# Altium PCB tiny200r3.PcbDoc
Units mil, origin at the board's own origin, x right, y up, seen from the top; angles counter-clockwise.
Board outline 2000 x 900 mil, 4 copper layers (Top Layer, GND, MidLayer1, Bottom Layer), stack 28.8 mil thick; 137 components, 116 nets, 551 pads, 241 vias.
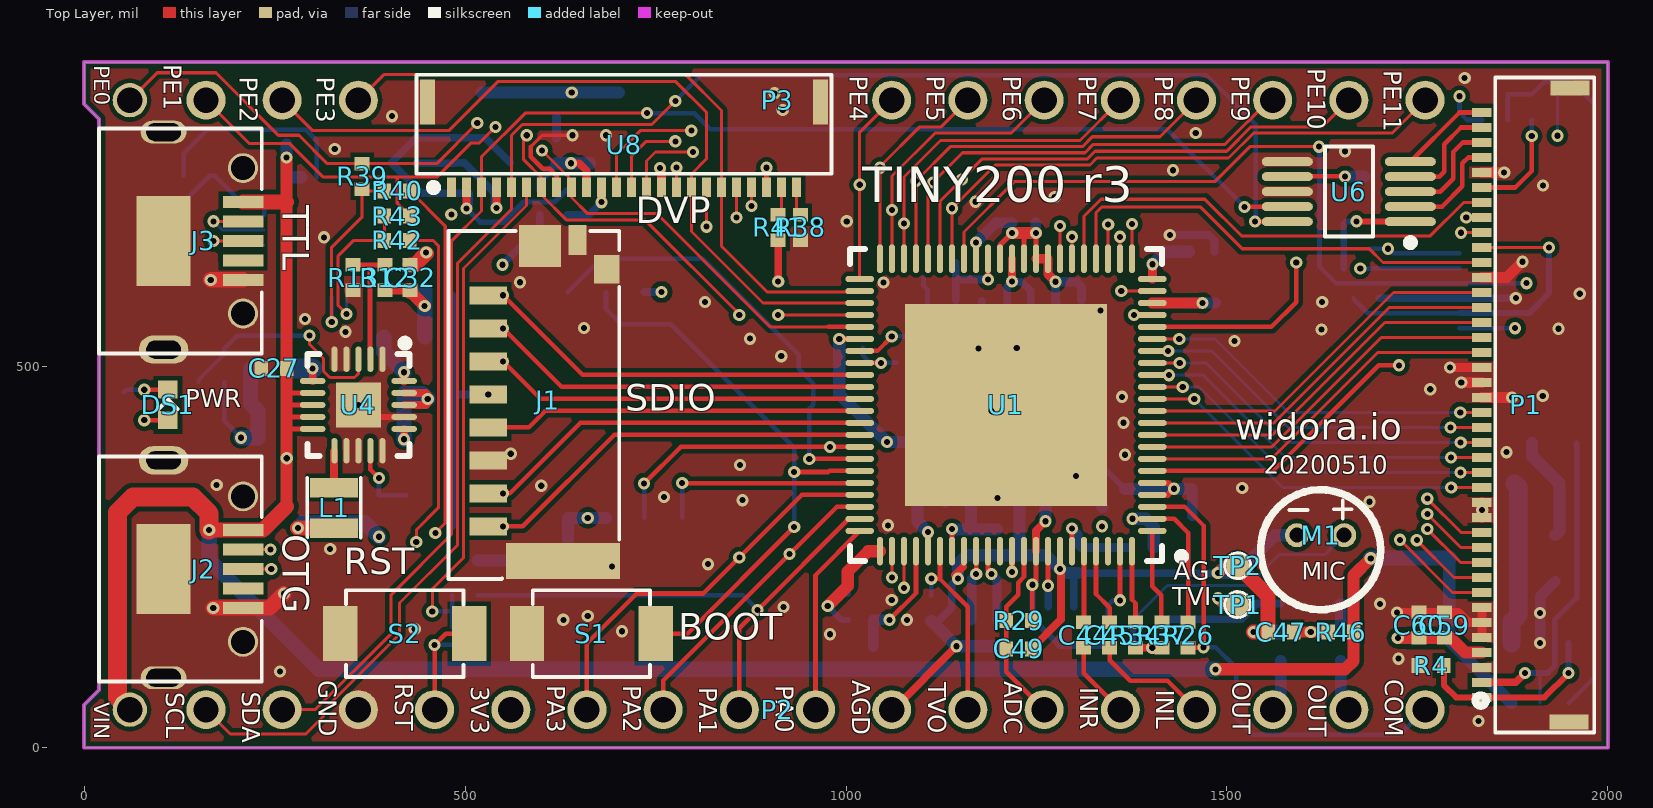
[diagram p0: Top Layer view]
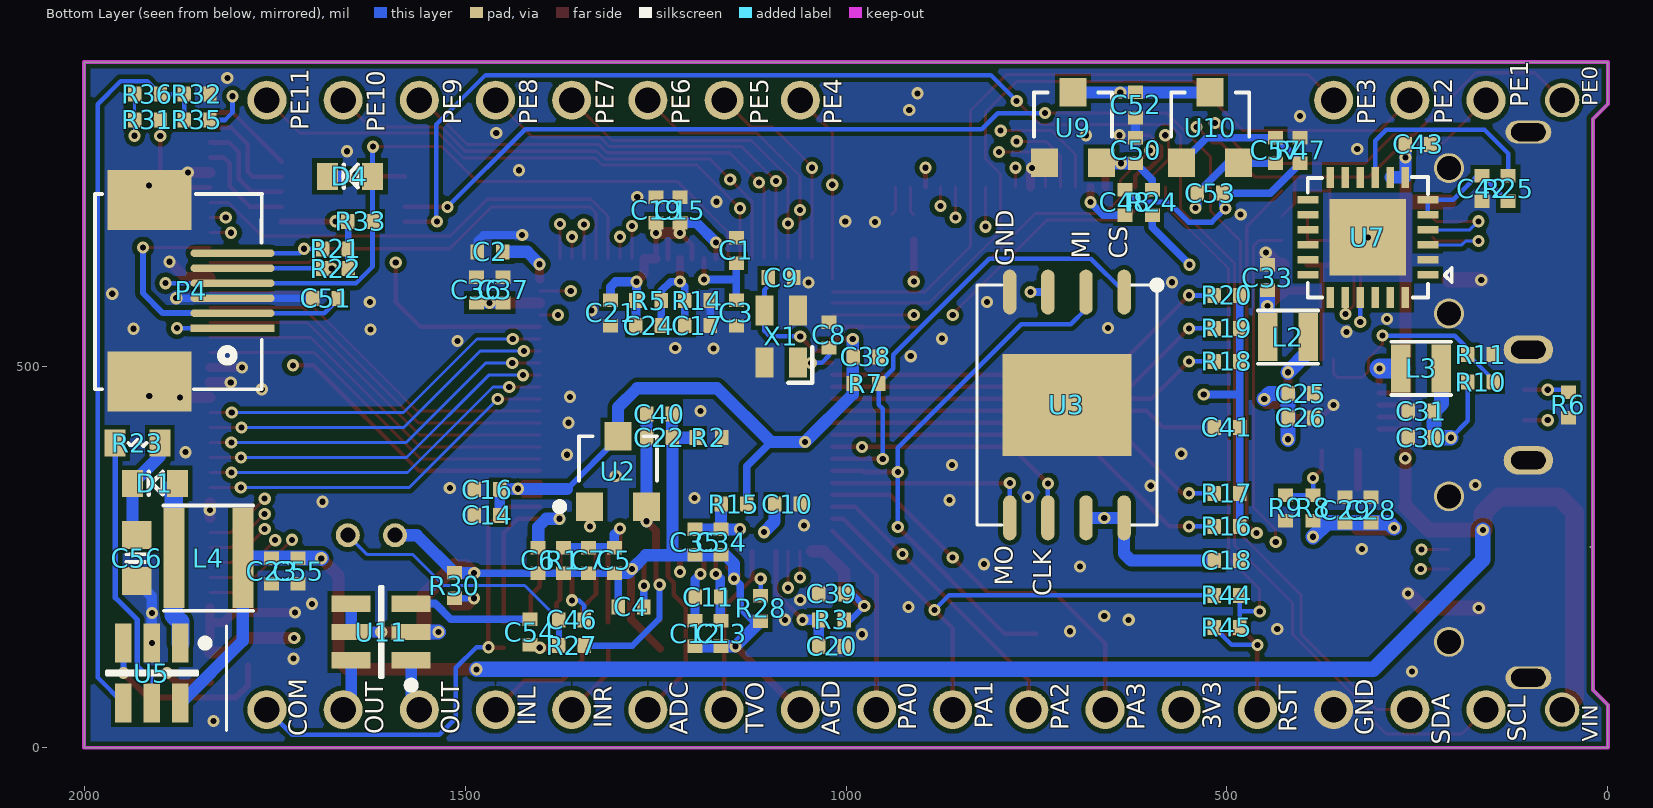
[diagram p1: Bottom Layer view, seen from below]
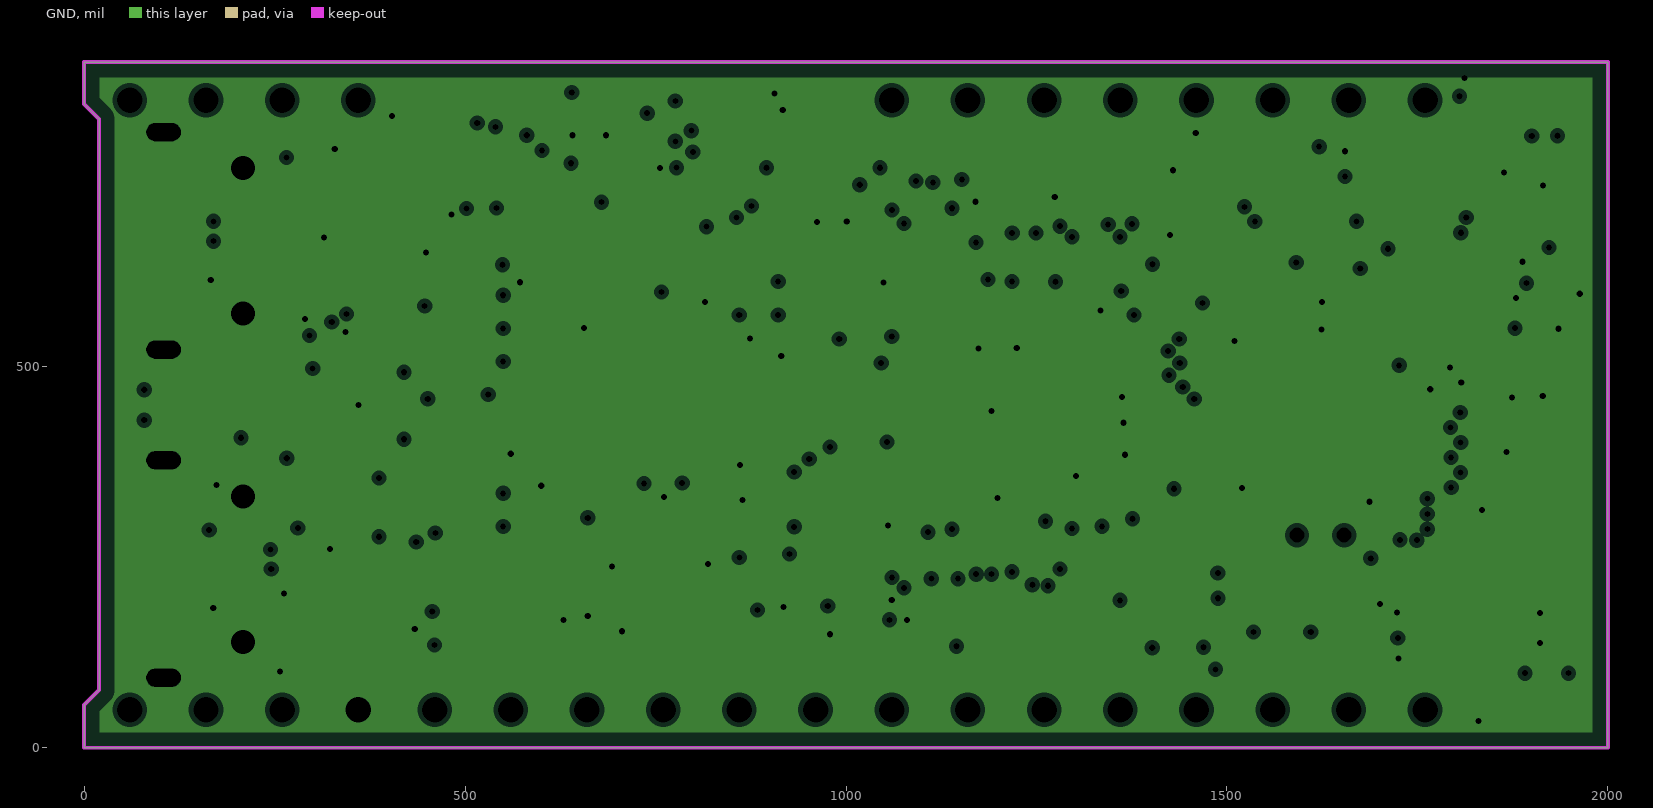
[diagram p2: GND, clearances drawn from the general rule]
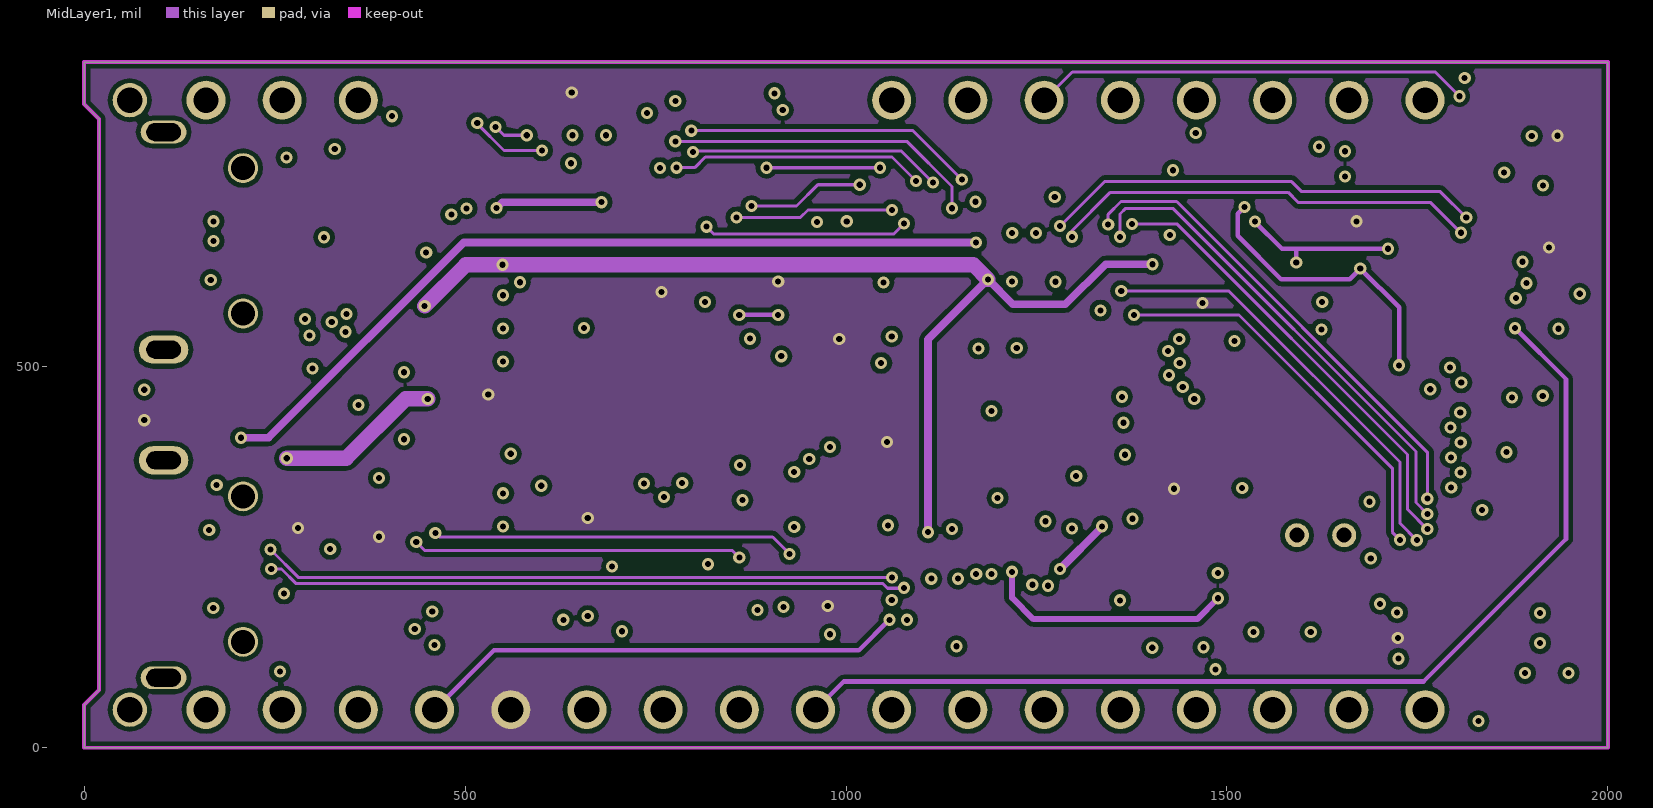
[diagram p3: MidLayer1]
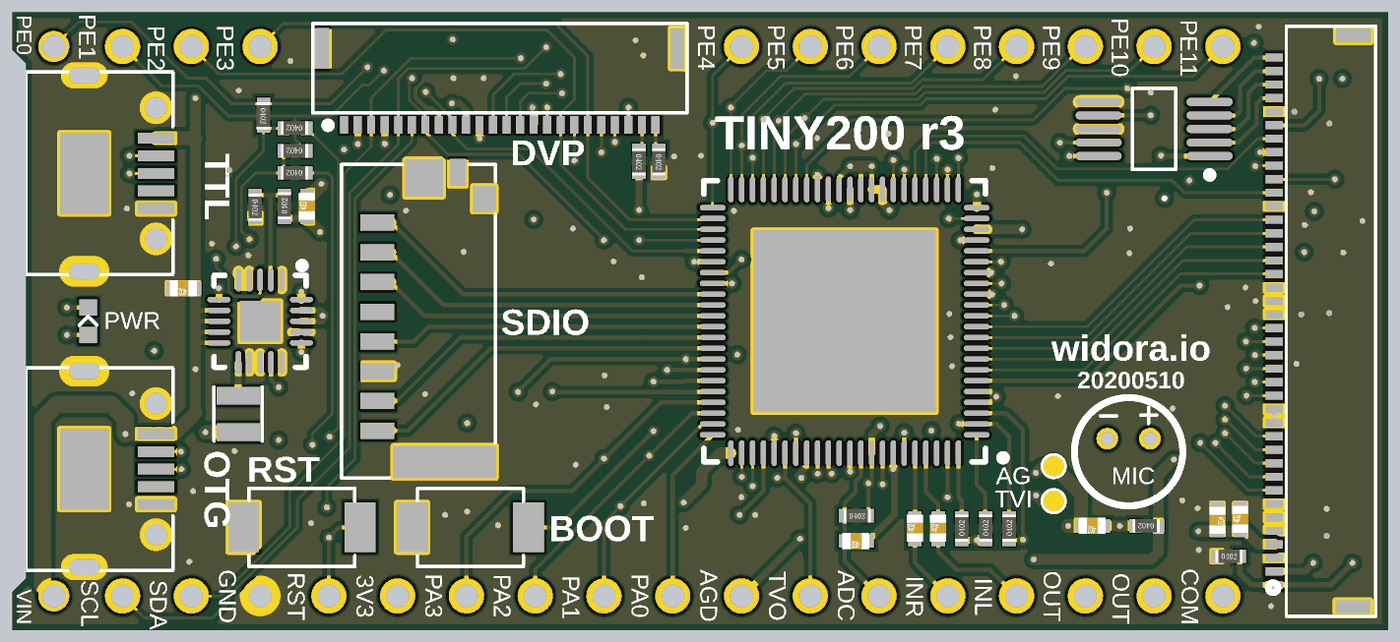
[diagram p4: 3D render of the assembled board from above, using the file's embedded part models]
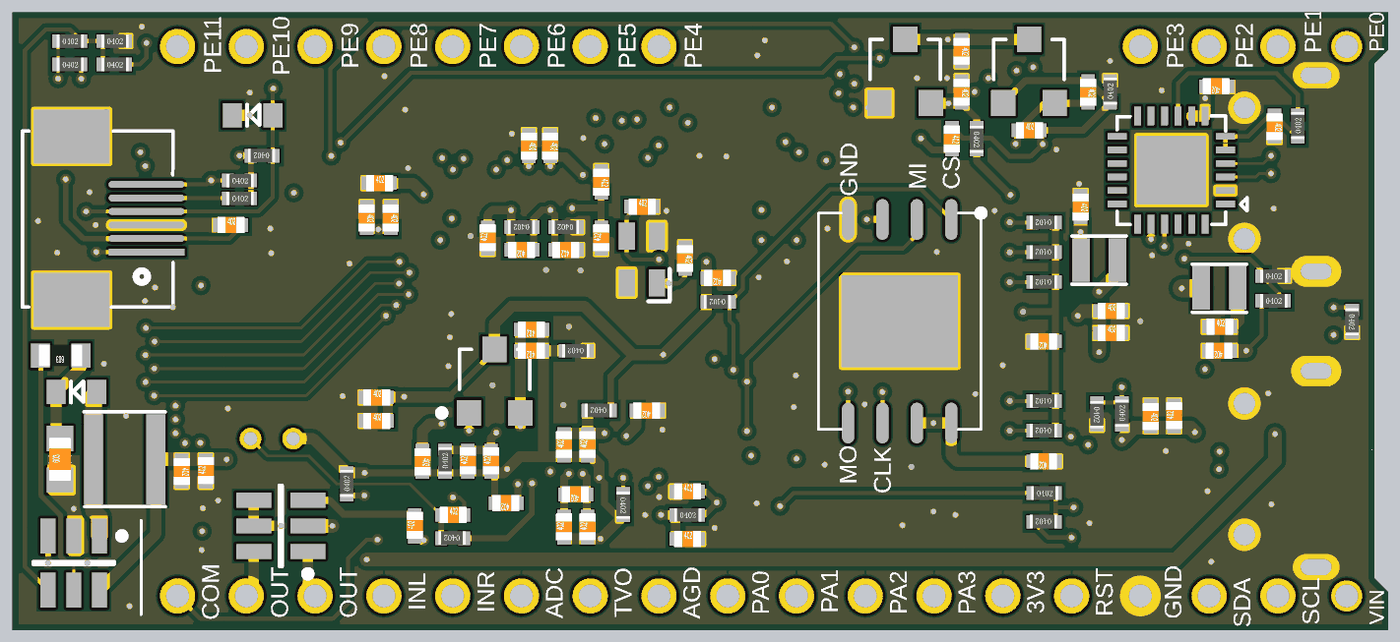
[diagram p5: 3D render of the assembled board from below, using the file's embedded part models]

## Layer stack, top to bottom
Top Layer: signal copper 1.4
Dielectric: core 7.6, FR-4, Dk 4.8
GND: plane copper 1.4, net GND
Dielectric: prepreg 8, FR-4, Dk 4.8
MidLayer1: signal copper 1.4
Dielectric: core 7.6, FR-4, Dk 4.8
Bottom Layer: signal copper 1.4

## Board outline
19.68,825.31 0,845 0,900 2000,900 2000,0 0,0 0,56 19.68,75.68

## Design rules (kind name [scope] priority, off if disabled: settings)
AssemblyTestPointUsage [All] p1 off:
AssemblyTestpoint [All] p1 off: testpointundercomponent=TRUE minsize=40 maxsize=100 preferedsize=60 minholesize=0 maxholesize=40 preferedholesize=32 testpointgrid=1 usegrid=TRUE gridtolerance=0.01 allowsidetop=TRUE allowsidebottom=TRUE
Clearance Clearance_Polygon [InPolygon] p1: gap=6
Clearance [All] p2: gap=4
ComponentClearance [All] p1 off: gap=1 collisioncheckmode=3 verticalgap=1 showdistances=FALSE
DiffPairsRouting [All] p1: maxlimit=20 minlimit=4 mostfreqgap=5 maxuncoupledlength=3000
FabricationTestPointUsage TestPointUsage [All] p1 off: valid=0 allowmultiple=FALSE
FabricationTestpoint Testpoint [(IsPad And (OnTopLayer Or OnBottomLayer))] p1 off: side=3 testpointundercomponent=TRUE minsize=40 maxsize=100 preferedsize=60 minholesize=0 maxholesize=40 preferedholesize=32 testpointgrid=1 allowsidetop=TRUE allowsidebottom=TRUE usegrid=TRUE gridtolerance=0.01
Height [All] p1 off: minheight=0 maxheight=1000 prefheight=500
HoleSize [All] p1: absolutevalues=TRUE maxlimit=150 minlimit=1 maxpercent=80.000 minpercent=20.000
MinimumSolderMaskSliver [All] p1 off: minsoldermaskwidth=1
PlaneClearance [All] p1: clearance=6
PlaneConnect [All] p1: planeconnectstyle=Direct reliefexpansion=20 reliefentries=4 reliefconductorwidth=25 reliefairgap=10
PolygonConnect PolygonConnect_isvia [All vs IsVia] p1: connectstyle=Direct reliefconductorwidth=10 reliefentries=4 polygonreliefangle="90 Angle"
PolygonConnect [All] p2: connectstyle=Direct reliefconductorwidth=8 reliefentries=4 polygonreliefangle="90 Angle"
RoutingVias [All] p1: holewidth=8 width=16 viastyle="Through Hole" minholewidth=8 minwidth=16 maxholewidth=100 maxwidth=100
ShortCircuit [InNet('WIFI') vs InNet('GND')] p1 off: allowed=FALSE
SilkToSilkClearance [All] p1: silktosilkclearance=0
SilkscreenOverComponentPads [IsPad] p1 off: minsilkscreentomaskgap=0
SolderMaskExpansion [All] p1: expansion=4
Width [All] p1: maxlimit=100 minlimit=4 preferedwidth=5
14 further rules are at their usual default settings.

## Classes and differential pairs
differential pair U: +U_P -U_N

## Components (designator, comment, footprint, x,y, rotation, side; value= is the part's Value field where it differs from the comment)
C1 "10uF" C0402 1144,653 r270 bottom
C2 "0.1uF" C0402 1467,651 r180 bottom
C3 "0.1uF" C0402 1144,571 r90 bottom
C4 "1uF" C0402 1282,185 r0 bottom
C5 "4.7uF" C0402 1304.11,246 r90 bottom
C6 "1uF" C0402 1404,246 r270 bottom
C7 "0.1uF" C0402 1338,246 r90 bottom
C8 "10pF" C0402 1022,542 r270 bottom
C9 "10pF" C0402 1085,617 r180 bottom
C10 "0.1uF" C0402 1077,320 r0 bottom
C11 "10uF" C0402 1181.11,197.7 r0 bottom
C12 "4.7uF" C0402 1198,150 r90 bottom
C13 "4.7uF" C0402 1164,150 r90 bottom
C14 "10uF" C0402 1471,305 r180 bottom
C15 "1uF" C0402 1218.11,705.7 r270 bottom
C16 "0.1uF" C0402 1471,339 r180 bottom
C17 "0.1uF" C0402 1195,554 r0 bottom
C18 "0.1uF" C0402 500,246 r0 bottom
C19 "10uF" C0402 1249.11,705.7 r270 bottom
C20 "1uF" C0402 1019,133 r180 bottom
C21 "0.1uF" C0402 1309,571 r90 bottom
C22 "4.7uF" C0402 1245,407 r0 bottom
C23 "10uF" C0402 1754,232 r270 bottom
C24 "0.1uF" C0402 1259,554 r0 bottom
C25 "10uF" C0402 403,465 r180 bottom
C26 "10uF" C0402 403,433 r180 bottom
C27 "10uF" C0402 249,498 r180 top
C28 "10uF" C0402 311,312 r90 bottom
C29 "0.1uF" C0402 345,312 r270 bottom
C30 "10uF" C0402 245,407 r0 bottom
C31 "0.1uF" C0402 245,442 r180 bottom
C32 "10uF" C0402 428,617 r90 top
C33 "0.1uF" C0402 447,617 r270 bottom
C34 "10uF" C0402 1164,270 r90 bottom
C35 "0.1uF" C0402 1198,270 r90 bottom
C36 "10uF" C0402 1485,601 r270 bottom
C37 "0.1uF" C0402 1450,601 r270 bottom
C38 "0.1uF" C0402 974,513 r0 bottom
C39 "0.1uF" C0402 1019,202 r180 bottom
C40 "0.1uF" C0402 1245,438 r0 bottom
C41 "104" C0402 499.96,420.48 r0 bottom
C42 "10uF" C0402 165,734 r270 bottom
C43 "10uF" C0402 249,792 r0 bottom
C44 "1uF" C0402 1312,148 r90 top
C45 "1uF" C0402 1346,148 r90 top
C46 "1uF" C0402 1360,168 r180 bottom
C47 "10uF" C0402 1570.63,152 r180 top
C48 "0.1uF" C0402 634,716 r270 bottom
C49 "1nF" C0402 1227,130 r180 top
C50 "0.1uF" C0402 620,784 r270 bottom
C51 "104" C0402 1683,590 r180 bottom
C52 "10uF" C0402 620,844 r270 bottom
C53 "10uF" C0402 522,728 r180 bottom
C54 "1uF" C0402 1415,152 r90 bottom
C55 "10uF" C0402 1719,232 r90 bottom
C56 "10uF/25V" C0603 1931,249 r90 bottom
C57 "0.1uF" C0402 436,784 r270 bottom
C59 "104" C0402 1785.27,161 r90 top
C60 "10uF" C0402 1752,161 r270 top
D1 "B5819WT" SOD523 1907,347 r0 bottom
D4 "B5819WT" SOD523 1651,750 r0 bottom
DS1 "GREEN" LED0402 110,450 r90 top
J1 "TF" TFCARD473092651 590.55,450 r270 top locked
J2 "MICRO_USB" MICROUSB-youxin#1 208.66,234.65 r270 top locked
J3 "MICRO_USB" MICROUSB-youxin#2 208.66,665.35 r270 top locked
L1 "2.2uH" VLS2016 328,315 r90 top
L2 "2.2uH" VLS2016 420,539 r180 bottom
L3 "2.2uH" VLS2016 245,498 r0 bottom
L4 "2.2uH" VLS3012E 1837,248.5 r180 bottom
M1 "MIC" MIC 1622.91,260 r0 top
P1 "FFC40-RGBLCD" FFC/SM0.5-1H40 1890,450 r90 top locked
P2 "Header 18" HDR1X18-M2#1 60,50 r0 top locked
P3 "Header 18" HDR1X18-M2#2 60,850 r0 top locked
P4 "FPC6" FPC6 1860,600 r90 bottom locked
R1 "200K" R0402 1371,246 r90 bottom
R2 "0R" R0402 1180,407 r0 bottom
R3 "10K" R0402 1019,168 r180 bottom
R4 "4R3" R0402 1768,108 r0 top
R5 "2K/1%" R0402 1259,587 r0 bottom
R6 "5.1K" R0402 52,450 r270 bottom
R7 "10K" R0402 974,478 r0 bottom
R8 "680K 1%" R0402 387,315 r90 bottom
R9 "150K 1%" R0402 423,315 r270 bottom
R10 "470K 1%" R0402 167,480 r180 bottom
R11 "150K 1%" R0402 167,516 r180 bottom
R12 "150K 1%" R0402 395,617 r90 top
R13 "150K 1%" R0402 353,617 r270 top
R14 "2K/1%" R0402 1195,587 r0 bottom
R15 "0R" R0402 1147,320 r0 bottom
R16 "10K" R0402 499.96,290.56 r0 bottom
R17 "10K" R0402 499.96,333.86 r0 bottom
R18 "10K" R0402 499.96,507.09 r0 bottom
R19 "10K" R0402 499.96,550.4 r0 bottom
R20 "10K" R0402 499.96,593.7 r0 bottom
R21 "10K" R0402 1670,655 r180 bottom
R22 "10K" R0402 1670,629 r180 bottom
R23 "22R" R0603 1930,400 r0 bottom
R24 "0R" R0402 598,716 r270 bottom
R25 "5.1K" R0402 131,734 r90 bottom
R26 "22R" R0402 1449,148 r90 top
R27 "1K" R0402 1360,134 r0 bottom
R28 "75R" R0402 1112,183 r270 bottom
R29 "100K" R0402 1227,167 r0 top
R30 "75R" R0402 1514,213 r90 bottom
R31 "10K" R0402 1917,824 r180 bottom
R32 "NC" R0402 1852,858 r180 bottom
R33 "10K" R0402 1637,691 r0 bottom
R34 "150K 1%" R0402 1380,148 r90 top
R35 "NC" R0402 1852,824 r180 bottom
R36 "1K" R0402 1917,858 r180 bottom
R37 "150K 1%" R0402 1415,148 r90 top
R38 "NC" R0402 940,683 r270 top
R39 "0R" R0402 365,750 r270 top
R40 "NC" R0402 411,731 r180 top
R41 "NC" R0402 911,683 r270 top
R42 "NC" R0402 411,666 r180 top
R43 "0R" R0402 411,698 r180 top
R44 "0R" R0402 500,200 r180 bottom
R45 "NC" R0402 500,158 r0 bottom
R46 "4R3" R0402 1649.37,152 r180 top
R47 "0R" R0402 404,784 r90 bottom
S1 "SW-BUTTON" MINIBUTTON 666,150 r180 top locked
S2 "SW-BUTTON" MINIBUTTON 421,150 r180 top locked
TP1 "TEST POINT" TEST-POINT 1514,188 r90 top
TP2 "TEST POINT" TEST-POINT 1514,239 r90 top
U1 "F1C200s" QFN40P1000X1000X85_HS-89N 1210,450 r180 top locked
U2 "XC6206-3.0" SOT23 1299.11,362.7 r180 bottom locked
U3 "SPIFLASH_SOP8W" WSON-SPIFLASH 710,450 r270 bottom locked
U4 "EA3036" QFN40P300X300X80_HS-21N 360,450 r270 top locked
U5 "SY7201" SOT23-6 1911,98 r270 bottom locked
U6 "NS2009" TSSOP10 1660,730 r180 top locked
U7 "CP2104" QFN24 315,670 r0 bottom locked
U8 "OV5640" "FFC/SM0.5-1H24 - OV2640" 708.66,791.34 r180 top locked
U9 "NC" SOT23 702,814 r180 bottom locked
U10 "XC6206-2.8" SOT23 522,814 r180 bottom locked
U11 "PAM8301" SOT23-6 1610,152 r0 bottom
X1 "XTAL2520-24M" XTAL2520 1085,540 r270 bottom

## Footprints (in the part's own frame and the unit in brackets; to place one, negate y for a bottom-side part, rotate by r counter-clockwise, add the part's x,y. Pads: shape width x height; smd on the part's side, far side on the other; paste and mask are expansions set on the pad)
C0402 [mm]
  rect 0.45x0.5 smd mask+0.051: 1(-0.425,0) 2(0.425,0)
  body extent -0.48,-0.3 0.52,0.3, height 0.2
C0603 [mm]
  rect 0.93x0.98 smd: 1(-0.77,0) 2(0.77,0)
  silkscreen extent -0.13,-0.35 0.13,0.35, body extent -0.8,-0.4 0.8,0.4, height 0.3
"FFC/SM0.5-1H24 - OV2640" [mm] "Connector; FH12 Series; 24 Position; 0.5mm Spaced Bottom Contact"
  rect 0.3x0.65 smd: 1(5.75,1.405) 2(5.25,1.405) 3(4.75,1.405) 4(4.25,1.405) 5(3.75,1.405) 6(3.25,1.405) 7(2.75,1.405) 8(2.25,1.405) 9(1.75,1.405) 10(1.25,1.405) 11(0.75,1.405) 12(0.25,1.405) 13(-0.25,1.405) 14(-0.75,1.405) 15(-1.25,1.405) 16(-1.75,1.405) 17(-2.25,1.405) 18(-2.75,1.405) 19(-3.25,1.405) 20(-3.75,1.405) 21(-4.25,1.405) 22(-4.75,1.405) 23(-5.25,1.405) 24(-5.75,1.405)
  rect 0.5x1.5 smd: P0(-6.553,-1.422) P0(6.553,-1.422)
  silkscreen extent -6.92,-2.34 6.92,1.55
FFC/SM0.5-1H40 [mm] "Connector; FH12 Series; 40 Position; 0.5mm Spaced Bottom Contact"
  rect 0.3x0.65 smd: 1(-9.75,1.405) 2(-9.25,1.405) 3(-8.75,1.405) 4(-8.25,1.405) 5(-7.75,1.405) 6(-7.25,1.405) 7(-6.75,1.405) 8(-6.25,1.405) 9(-5.75,1.405) 10(-5.25,1.405) 11(-4.75,1.405) 12(-4.25,1.405) 13(-3.75,1.405) 14(-3.25,1.405) 15(-2.75,1.405) 16(-2.25,1.405) 17(-1.75,1.405) 18(-1.25,1.405) 19(-0.75,1.405) 20(-0.25,1.405) 21(0.25,1.405) 22(0.75,1.405) 23(1.25,1.405) 24(1.75,1.405) 25(2.25,1.405) 26(2.75,1.405) 27(3.25,1.405) 28(3.75,1.405) 29(4.25,1.405) 30(4.75,1.405) 31(5.25,1.405) 32(5.75,1.405) 33(6.25,1.405) 34(6.75,1.405) 35(7.25,1.405) 36(7.75,1.405) 37(8.25,1.405) 38(8.75,1.405) 39(9.25,1.405) 40(9.75,1.405)
  rect 0.5x1.3 smd: G(-10.566,-1.499) G(10.566,-1.524)
  silkscreen extent -10.91,-2.34 10.92,0.96
FPC6 [mm]
  rect 2x2.8 smd: 0(-3.023,1.372) 0(3.023,1.372)
  rect 0.25x2.8 smd: 1(-1.25,-1.392)
  oval 0.25x2.8 smd: 2(-0.75,-1.392) 3(-0.25,-1.392) 4(0.25,-1.392) 5(0.75,-1.392) 6(1.25,-1.392)
  silkscreen extent -3.29,-2.38 3.22,3.19
HDR1X18-M2#1 [mm]
  round 1.143 hole 0.85: 1(0,0)
  round 1.3 hole 0.85: 2(2.54,0) 3(5.08,0) 4(7.62,0) 5(10.16,0) 6(12.7,0) 7(15.24,0) 8(17.78,0) 9(20.32,0) 10(22.86,0) 11(25.4,0) 12(27.94,0) 13(30.48,0) 14(33.02,0) 15(35.56,0) 16(38.1,0) 17(40.64,0) 18(43.18,0)
HDR1X18-M2#2 [mm]
  round 1.143 hole 0.85: 1(0,0)
  round 1.3 hole 0.85: 2(2.54,0) 3(5.08,0) 4(7.62,0) 11(25.4,0) 12(27.94,0) 13(30.48,0) 14(33.02,0) 15(35.56,0) 16(38.1,0) 17(40.64,0) 18(43.18,0)
LED0402 [mm]
  rect 0.6x0.65 smd: A(-0.508,0) K(0.508,0)
  silkscreen extent -0.15,-0.32 0.18,0.33
MIC [mm]
  round 0.8 hole 0.5: 1(0.787,0.483) 2(-0.787,0.483)
  silkscreen extent -2,-2 2,2
MICROUSB-youxin#1 [mm] "MICROUSB-youxin"
  rect 0.4x1.35 smd: 1(-1.3,0) 2(-0.65,0) 3(0,0) 4(0.65,0) 5(1.3,0)
  oval 0.94x1.65 hole 0.6 slot 1.15 at 90 deg: 6(-3.625,-2.65)
  oval 0.762x1.524 hole 0.6 slot 1.15 at 90 deg: 6(3.625,-2.65)
  rect 3x1.8 smd: 7(0,-2.65)
  round 1 hole 0.8: 8(-2.425,0) 9(2.425,0)
  silkscreen extent -3.75,-4.8 3.75,0.62
MICROUSB-youxin#2 [mm] "MICROUSB-youxin"
  rect 0.4x1.35 smd: 1(-1.3,0) 2(-0.65,0) 3(0,0) 4(0.65,0) 5(1.3,0)
  oval 0.762x1.524 hole 0.6 slot 1.15 at 90 deg: 6(-3.625,-2.65)
  oval 0.94x1.65 hole 0.6 slot 1.15 at 90 deg: 6(3.625,-2.65)
  rect 3x1.8 smd: 7(0,-2.65)
  round 1 hole 0.8: 8(-2.425,0) 9(2.425,0)
  silkscreen extent -3.75,-4.8 3.75,0.62
MINIBUTTON [mil] "MINIBUTTON"
  rect 44.88x72.05 smd: 1(-84.42,0.08) 2(84.88,0.08)
  silkscreen extent -77,-57 77,57
QFN24 [mm]
  rect 0.7x0.25 smd: 1(-2,1.25) 2(-2,0.75) 3(-2,0.25) 4(-2,-0.25) 5(-2,-0.75) 6(-2,-1.25) 13(2,-1.25) 14(2,-0.75) 15(2,-0.25) 16(2,0.25) 17(2,0.75) 18(2,1.25)
  rect 0.25x0.7 smd: 7(-1.25,-2) 8(-0.75,-2) 9(-0.25,-2) 10(0.25,-2) 11(0.75,-2) 12(1.25,-2) 19(1.25,2) 20(0.75,2) 21(0.25,2) 22(-0.25,2) 23(-0.75,2) 24(-1.25,2)
  rect 2.55x2.55 smd: 25(0,0)
  silkscreen extent -2.79,-2.01 2.01,2.01
QFN40P300X300X80_HS-21N [mm] "QFN, 20-Leads, Body 3.00x3.00mm, Pitch 0.40mm, Thermal Pad 1.65x1.65mm, IPC Medium Density"
  oval 0.85x0.2 smd: 1(-1.525,0.8) 2(-1.525,0.4) 3(-1.525,0) 4(-1.525,-0.4) 5(-1.525,-0.8) 11(1.525,-0.8) 12(1.525,-0.4) 13(1.525,0) 14(1.525,0.4) 15(1.525,0.8)
  oval 0.2x0.85 smd: 6(-0.8,-1.525) 7(-0.4,-1.525) 8(0,-1.525) 9(0.4,-1.525) 10(0.8,-1.525) 16(0.8,1.525) 17(0.4,1.525) 18(0,1.525) 19(-0.4,1.525) 20(-0.8,1.525)
  rect 1.5x1.5 smd: 21(0,0)
  silkscreen extent -2.18,-1.7 1.7,1.7, body extent -1.55,-1.55 1.55,1.55, height 0.8
QFN40P1000X1000X85_HS-89N [mm] "QFN, 88-Leads, Body 10.00x10.00mm, Pitch 0.40mm, Thermal Pad 6.74x6.74mm, IPC Medium Density"
  oval 0.95x0.2 smd: 1(-4.875,4.2) 2(-4.875,3.8) 3(-4.875,3.4) 4(-4.875,3) 5(-4.875,2.6) 6(-4.875,2.2) 7(-4.875,1.8) 8(-4.875,1.4) 9(-4.875,1) 10(-4.875,0.6) 11(-4.875,0.2) 12(-4.875,-0.2) 13(-4.875,-0.6) 14(-4.875,-1) 15(-4.875,-1.4) 16(-4.875,-1.8) 17(-4.875,-2.2) 18(-4.875,-2.6) 19(-4.875,-3) 20(-4.875,-3.4) 21(-4.875,-3.8) 22(-4.875,-4.2) 45(4.875,-4.2) 46(4.875,-3.8) 47(4.875,-3.4) 48(4.875,-3) 49(4.875,-2.6) 50(4.875,-2.2) 51(4.875,-1.8) 52(4.875,-1.4) 53(4.875,-1) 54(4.875,-0.6) 55(4.875,-0.2) 56(4.875,0.2) 57(4.875,0.6) 58(4.875,1) 59(4.875,1.4) 60(4.875,1.8) 61(4.875,2.2) 62(4.875,2.6) 63(4.875,3) 64(4.875,3.4) 65(4.875,3.8) 66(4.875,4.2)
  oval 0.2x0.95 smd: 23(-4.2,-4.875) 24(-3.8,-4.875) 25(-3.4,-4.875) 26(-3,-4.875) 27(-2.6,-4.875) 28(-2.2,-4.875) 29(-1.8,-4.875) 30(-1.4,-4.875) 31(-1,-4.875) 32(-0.6,-4.875) 33(-0.2,-4.875) 34(0.2,-4.875) 35(0.6,-4.875) 36(1,-4.875) 37(1.4,-4.875) 38(1.8,-4.875) 39(2.2,-4.875) 40(2.6,-4.875) 41(3,-4.875) 42(3.4,-4.875) 43(3.8,-4.875) 44(4.2,-4.875) 67(4.2,4.875) 68(3.8,4.875) 69(3.4,4.875) 70(3,4.875) 71(2.6,4.875) 72(2.2,4.875) 73(1.8,4.875) 74(1.4,4.875) 75(1,4.875) 76(0.6,4.875) 77(0.2,4.875) 78(-0.2,4.875) 79(-0.6,4.875) 80(-1,4.875) 81(-1.4,4.875) 82(-1.8,4.875) 83(-2.2,4.875) 84(-2.6,4.875) 85(-3,4.875) 86(-3.4,4.875) 87(-3.8,4.875) 88(-4.2,4.875)
  rect 6.74x6.74 smd: 89(0,0)
  silkscreen extent -5.97,-5.2 5.2,5.2, body extent -5.05,-5.05 5.05,5.05, height 0.85
R0402 [mm]
  rect 0.45x0.5 smd mask+0.051: 1(-0.425,0) 2(0.425,0)
  body extent -0.47,-0.25 0.53,0.25, height 0.35
R0603 [mm]
  rect 0.7x0.9 smd: 1(-0.75,0) 2(0.75,0)
  silkscreen extent -0.3,-0.1 0.3,0.1, body extent -0.8,-0.4 0.8,0.4, height 0.3
SOD523 [mm]
  rect 0.7x0.9 smd: A(-0.75,0) K(0.75,0)
  silkscreen extent -0.25,-0.38 0.2,0.38
SOT23 [mm] "SOT-23; 3 Leads; Body 3.0 x 2.5 mm, inc. leads (LxW max)"
  rect 0.9x0.95 smd: 1(-0.95,-1.175) 2(0.95,-1.175) 3(0,1.175)
  silkscreen extent -2.07,-1.3 1.3,1.18
SOT23-6 [mm] "SOT23, 5-Leads, Body 3.0x2.6mm (max), Pitch 0.95mm, IPC Medium Density"
  rect 1.3x0.55 smd: 1(-1,0.95) 2(-1,0) 3(-1,-0.95) 4(1,-0.95) 5(1,0) 6(1,0.95)
  silkscreen extent -1.12,-1.5 0.05,1.9, body extent -0.7,-1.5 0.7,1.5, height 1.1
TEST-POINT [mil]
  round 30 smd paste-15.75: 1(0,0)
  silkscreen extent -17,-17 17,17
TFCARD473092651 [mm] "TFCARD473092651"
  rect 0.6x1.25 smd: 1(-3.65,-1.525) 2(-2.55,-1.525) 3(-1.45,-1.525) 4(-0.35,-1.525) 5(0.75,-1.525) 6(1.85,-1.525) 7(2.95,-1.525) 8(4.05,-1.525)
  rect 1.2x3.8 smd: G1(5.2,0.96)
  rect 1.4x1.4 smd: G2(-5.3,0.2)
  rect 1x0.6 smd: G3(-5.5,1.45)
  rect 0.95x0.85 smd: G4(-4.525,2.425)
  silkscreen extent -5.8,-2.85 5.8,2.84
TSSOP10 [mm] "TSSOP, 10-Leads, Body 3.0x3.0mm (max), Pitch 0.50mm, IPC Medium Density"
  oval 1.7x0.3 smd: 1(-2.05,1) 2(-2.05,0.5) 3(-2.05,0) 4(-2.05,-0.5) 5(-2.05,-1) 6(2.05,-1) 7(2.05,-0.5) 8(2.05,0) 9(2.05,0.5) 10(2.05,1)
  silkscreen extent -2.18,-1.5 0.8,1.82, body extent -1.5,-1.5 1.5,1.5, height 1.1
VLS2016 [mm]
  rect 0.65x1.6 smd: 1(0.675,0) 2(-0.675,0)
  silkscreen extent -1,-0.89 1,0.89
VLS3012E [mil]
  rect 27.56x131.1 smd: 1(45.28,0.5) 2(-45.28,0.5)
  silkscreen extent -59,-69 59,70
WSON-SPIFLASH [mm]
  oval 1.5x0.45 smd: 1(-3.764,1.905) 2(-3.764,0.635) 3(-3.764,-0.635) 4(-3.764,-1.905) 5(3.764,-1.905) 6(3.764,-0.635) 7(3.764,0.635) 8(3.764,1.905)
  rect 3.4x4.3 smd: 4(0,0)
  silkscreen extent -4.12,-3 4,3.12
XTAL2520 [mil] "XTAL2520"
  rect 39.37x23.62 smd: 1(34,22) 2(-34,22) 3(-34,-22) 4(34,-22)
  silkscreen extent 14,9 61,40

## Part data
C1 C2 C3 C4 C5 C6 C7 C8 C9 C10 C11 C12 C13 C14 C15 C16 C17 C18 C19 C20 C21 C22 C23 C24 C25 C26 C27 C28 C29 C30 C31 C32 C33 C34 C35 C36 C37 C38 C39 C40 C41 C42 C43 C44 C45 C46 C47 C48 C49 C50 C51 C52 C53 C54 C55 C56 C57 C59 C60: library part CAP, "普通"
D1 D4: library part Diode, "普通"
DS1: library part LED
J1: library part TF_473092651
L1 L2 L3 L4: library part L, "普通"
P2 P3: "Header, 18-Pin"
R1 R2 R3 R4 R5 R7 R8 R9 R10 R11 R12 R13 R14 R15 R16 R17 R18 R19 R20 R21 R22 R23 R24 R25 R26 R27 R28 R29 R30 R31 R32 R33 R34 R35 R36 R37 R38 R39 R40 R41 R42 R43 R44 R45 R46 R47: library part RES, "普通"
R6: library part RES, "普通电"
TP1 TP2: library part TP, "Description"
U2 U9 U10: library part XC6206
U5: library part PT4101
U8: "Header, 24-Pin"
X1: library part XTAL3225

## Via types
v1: diameter 16, hole 8, Top Layer to Bottom Layer, tented both sides, 241 vias

## Nets (pads, with @x,y where several pads share a name; then routed paths per layer and width w, separated by ;. In a path a pad name is that pad's centre, name@x,y a point inside that pad or via, vN(x,y) a via of type N, cw(c..) or ccw(c..) an arc to the next point about the centre after c; other vN are vias at no path point)
AAGND: C48.1 C53.2 C57.1 R47.1 U8.2 U10.1 | length 505.2
  Top Layer w10: v1(501.97,708) U8.2
  Bottom Layer w7: v1@505.27,711.3 505.27,704.7 519.97,690 550.25,690 576.63,716.37 617.64,716.37 C48.1
  Bottom Layer w10: v1@505.27,711.3 C53.2 443.27,728 R47.1 404,768.73 C57.1 526.41,800.73 U10.1
AGND: C4.2 C5.1 C6.2 C7.1 C12.1 C13.1 C22.1 C34.1 C35.1 C40.1 C47.2 C49.1 M1.2 P2.11 R1.1 R2.2 R28.2 R30.2 TP2.1 U1.74 U1.82 U2.1 U11.2 | length 1467.2
  Top Layer w10: P2.11 1061.73,50 v1(1145,133.27) ; v1@1142.7,226.3 1153.88,237.47 ; C49.1 1282.12,168.39 1282.12,233.45 v1(1280.87,234.7)
  Top Layer w16: v1(1488,229.27) 1497.73,239 TP2.1
  Top Layer w20: TP2.1 1553.9,199.1 C47.2 v1(1535,152)
  MidLayer1 w10: v1(1280.87,234.7) 1336.11,289.94 v1(1336.11,290.7)
  Bottom Layer w10: P2.11@1056,54 P2.11 ; R28.2 1121.27,166.27 1139,184 1139,214 v1(1147,222) ; C4.2 1298.73,223.89 C5.1 C7.1 R1.1 C6.2 v1(1488,229.27)
  Bottom Layer w16: R28.2 v1(1145,133.27) C13.1 C12.1 ; v1(1147,222) 1147,241.59 1158.11,252.7 1227.84,252.7 ; R2.2 C22.1 C40.1 ; C22.1@1227.84,406.57 1227.84,252.7 ; C5.1 1286.3,229.27 v1(1280.87,234.7) 1262.87,252.7 1227.84,252.7 ; U2.1@1336.11,316.04 U2.1 ; v1(1488,229.27) 1513.54,229.27 R30.2 1563.27,279 M1.2
  Bottom Layer w20: v1(1535,152) U11.2
AVCC: C22.2 C40.2 R27.1 R29.2 U1.80 U2.2 | length 436.2
  Top Layer w6: R29.2 1244.56,167.83 v1(1244.56,214) 1249.37,218.81 U1.80
  Top Layer w10: U1.80 1249.37,284.96 v1(1261.71,297.3)
  Bottom Layer w8: v1(1244.56,214) 1244.56,169.79 1280.35,134 R27.1
  Bottom Layer w16: v1(1261.71,297.3) U2.2 C22.2 ; C22.2 C40.2
AVDD2V8: C48.2 C53.1 C57.2 U8.4 U8.11 U10.2 | length 380.2
  Top Layer w10: v1(541.34,708.34) U8.4 ; v1(679.13,716.13) U8.11
  MidLayer1 w10: v1(541.34,708.34) 549.13,716.13 v1(679.13,716.13)
  Bottom Layer w10: C57.2 U10.2@484.13,767.27 ; U10.2 498.99,767.74 C53.1 538.73,710.95 v1(541.34,708.34) ; C48.2 662.27,699.27 v1(679.13,716.13)
DVP-Y2: P3.4 U1.46 U8.19 | length 895.1
  Top Layer w4: P3.4 393.43,883.43 789.57,883.43 836.61,836.39 U8.19 836.61,658.39 897,598 1016.46,598 U1.46
DVP-Y3: P3.11 U1.45 U8.21 | length 430.7
  Top Layer w4: v1(875.98,711.02) U8.21 ; U1.45 1018,615.43 v1(1018,739) 1018,808 P3.11
  MidLayer1 w4: v1(875.98,711.02) 935.02,711.02 963,739 v1(1018,739)
DVP-Y4: P3.12 U1.44 U8.22 | length 446.7
  Top Layer w4: U1.44 1044.65,762.98 1096.67,815 1125,815 P3.12
  Top Layer w6: U8.22 v1(895.67,761.33)
  MidLayer1 w4: v1(895.67,761.33) v1(1044.65,761.33)
DVP-Y5: P3.13 R35.2 U1.43 U8.20 | length 1226.8
  Top Layer w4: v1(856.3,696) U8.20 ; U1.43 1060.39,750.39 1117,807 1217,807 P3.13
  MidLayer1 w4: v1(856.3,696) 940,696 950,706 v1(1060.39,706) ; P3.13 1297,887 1773.39,887 v1(1805.2,855.2)
  Bottom Layer w6: v1(1805.2,855.2) 1805.2,833.86 1815.05,824 R35.2
DVP-Y6: P3.14 U1.42 U8.18 | length 757.9
  Top Layer w4: v1@816.93,679.93 v1(816.93,684) U8.18 ; U1.42 1076.14,749.14 1124,797 1307,797 P3.14
  MidLayer1 w4: v1(816.93,684) 826.71,674.22 1062.36,674.22 v1(1076.14,688)
DVP-Y7: P3.15 U1.41 U8.16 | length 872.5
  Top Layer w4: U8.16 v1(777.56,761.44) ; U1.41 v1(1091.89,743.89) 1137,789 1310.31,789 1323.31,802 1412,802 P3.15
  MidLayer1 w4: v1(777.56,761.44) 801.44,761.44 815.33,775.33 1060.45,775.33 v1(1091.89,743.89)
DVP-Y8: P3.16 U1.40 U8.14 | length 1026
  Top Layer w4: U8.14 738.19,770.19 750,782 v1(799,782) ; U1.40 1107.64,735.64 v1(1114,742) 1153,781 1313.63,781 1324.63,792 1497.37,792 1555.37,850 P3.16
  MidLayer1 w4: v1(799,782) 800.33,783.33 1072.67,783.33 v1(1114,742)
DVP-Y9: P3.17 U1.39 U8.12 | length 1202.4
  Top Layer w4: U8.12 698.82,778.82 730,810 v1(797,810) ; U1.39 1123.39,717.39 v1(1152,746) 1179,773 1316.94,773 1326.94,783 1499.69,783 1531.69,815 1625,815 P3.17
  MidLayer1 w4: v1(797,810) 1088,810 v1(1152,746)
DVP_DVDD: C50.2 R24.1 U8.10 U9.2 | length 133.8
  Top Layer w10: v1(639,767.27) 649.73,767.27 659.45,757.55 U8.10
  Bottom Layer w10: R24.1 598,745.27 C50.2
  Bottom Layer w16: C50.2 v1(639,767.27) U9.2@664.13,767.27
DVP_HSYNC: P3.1 R39.1 U1.49 U8.9 | length 1169.2
  Top Layer w4: P3.1 96,886 173,886 255,804 282,804 319.27,766.73 R39.1 462.73,766.73 v1(516,820) ; v1(601,784) 639.76,745.24 U8.9 639.76,722.24 661,701 752,701 900.64,552.36 976.64,552.36
  Top Layer w6: 976.64,552.36 U1.49
  MidLayer1 w4: v1(516,820) 516,819.2 551.2,784 v1(601,784)
DVP_PCLK: P3.3 U1.47 U8.17 | length 1041
  Top Layer w4: P3.3 300,810 478.63,810 542.89,874.26 776.74,874.26 817,834 817,773 797.24,753.24 U8.17 797.24,677.76 891.14,583.86 U1.47
DVP_RST: R44.2 R45.1 U8.6 | length 676.5
  Top Layer w4: v1(457,179) 457,208.37 498,249.37 498,629 580.71,711.71 U8.6
  Bottom Layer w6: v1(457,179) 483.27,179 ; R45.1 483.27,179 ; R44.2 483.27,179
DVP_SCL: P2.2 P4.6 R21.1 U1.18 U6.10 U8.5 | length 2832.1
  Top Layer w4: P2.2 192,18 291,18 314,41 314,49 414,149 414,190 490,266 490,636 561.02,707.02 U8.5 561.02,803.82 575.2,818 745,818 v1(776,849)
  Top Layer w6: U1.18 1558.36,552.36 1591,585 v1(1591,637) ; v1(1536.63,690.63) U6.10
  MidLayer1 w6: v1(1536.63,690.63) 1572.26,655 v1(1711.21,655) ; v1(1591,637) 1591,655
  Bottom Layer w6: v1(776,849) 810,883 1473.09,883 1538,818.09 1538,692 v1(1536.63,690.63) ; R21.1 v1(1711.21,655) 1717,649.21 P4.6
DVP_SDA: P2.3 P4.5 R22.1 U1.6 U6.9 U8.3 | length 2885.3
  Top Layer w4: P2.3 303.15,50 403,149.85 403,201 482,280 482,665 521.65,704.65 U8.3 521.65,775.77 578.89,833 v1(739,833)
  Top Layer w6: U1.6 1560.39,363.39 1699,502 v1(1726,502) ; v1(1523,710) 1578.98,710 U6.9
  MidLayer1 w6: v1(1523,710) 1514,701 1514,672 1571,615 1661,615 v1(1675,629) 1726,578 v1(1726,502)
  Bottom Layer w6: v1(739,833) 801,833 822,812 1421,812 v1(1523,710) ; v1@1673,629 R22.1 ; R22.1@1687.26,629.53 P4.5
DVP_VSYNC: P3.2 R43.1 U1.48 U8.7 | length 1125.6
  Top Layer w4: P3.2 217,793 270,793 314,749 411,749 ; R43.1 411,714.73 411,749 ; v1(540,815) 519,794 508,794 463,749 411,749 ; v1(581,804) 577,800 577,772 600.39,748.61 U8.7 600.39,725.61 633,693 736,693 v1@860.39,568.61 ; v1(911,568.11) U1.48
  MidLayer1 w4: v1(540,815) 551,804 v1(581,804)
  MidLayer1 w6: v1(859.89,568.11) v1(911,568.11)
DVP_XCLK: P3.18 U1.38 U8.13 | length 1268.1
  Top Layer w4: U8.13 718.5,776.5 738,796 v1(776,796) ; U1.38 v1(1139.13,708.13) 1196,765 1320.25,765 1329.25,774 1502,774 1535,807 1717,807 P3.18
  MidLayer1 w4: v1(776,796) 1079.8,796 1139.13,736.67 v1(1139.13,708.13)
FMINL: C44.2 U1.84 | length 93.4
  Top Layer w6: U1.84@1312.04,257.75 U1.84 C44.2@1312.36,165.09
FMINR: C45.2 U1.85 | length 100.7
  Top Layer w6: U1.85 1328.11,201.89 1346,184 C45.2
GND: C1.1 C2.1 C3.1 C8.1 C9.2 C10.1 C14.1 C15.1 C16.1 C17.1 C18.1 C19.1 C20.2 C21.1 C23.2 C25.2 C26.2 C27.2 C28.2 C29.1 C30.2 C31.1 C32.2 C33.1 C36.1 C37.1 C38.1 C39.1 C41.2 C42.2 C43.1 C50.1 C51.1 C52.2 C55.1 C56.1 C59.2 C60.1 J1.6 J1.G1 J1.G2 J1.G3 J1.G4 J2.5 J2.6 J2.7 J2.8 J2.9 J3.5 J3.6 J3.7 J3.8 J3.9 P1.3 P1.5 P1.6 P1.7 P1.13 P1.14 P1.21 P1.22 P1.23 P1.29 P1.36 P1.G P2.4 P4.0 P4.3 R2.1 R4.1 R6.2 R9.2 R11.2 R13.2 R14.1 R32.2 R38.2 R47.2 S1.2 S2.2 U1.89 U3.4 U4.1 U4.4 U4.5 U4.12 U4.13 U4.15 U4.17 U4.21 U5.2 U6.6 U6.8 U7.2 U7.25 U8.8 U8.15 U8.P0 U9.1 X1.2 X1.4 | length 1176.4
  Top Layer w4: 586.1,788.9 601.2,804 v1(641,804)
  Top Layer w6: 586,789 586,776 602.14,759.86 611.14,759.86 620.08,750.92 U8.8
  Top Layer w8: v1(360,450) 375.75,434.25 U4.17
  Top Layer w12: v1(756,761) 757.87,759.13 U8.15 ; v1(1723.27,177.73) C60.1 C59.2 1803.27,177.73 1816.43,164.57 P1.6 ; v1(1792.79,499.21) P1.23 ; P1.5 P1.6 ; P1.7 P1.6
  Top Layer w14: v1(1807.47,479.53) P1.22 ; P1.13 P1.14 ; P1.21 v1(1874,459.84) ; P1.29 1867.32,617.32 v1(1888,638) ; P1.36 v1(1863.88,755.12)
  Top Layer w20: v1(166.17,614.17) J3.5 ; v1(169.53,183.47) J2.5 243.47,183.47 v1(262.5,202.5) ; C32.2 433.96,633.73 v1@449,648.77
  Bottom Layer w10: C17.1 R14.1 ; v1(1425,673) 1476,673 1483.73,665.27 C2.1 ; C51.1 P4.3@1805.05,590 ; P4.3 v1(1879.16,590.16)
  Bottom Layer w12: C50.1 C52.2
  Bottom Layer w14: v1(1911,137.37) 1911,198.68 C56.1
  other v1: 1830,35 257,100 1725,117 979,149 706,153 434,156 629,168 1080,168 661,173 1911,177 918,185 1701,189 1060,194 693,238 819,241 323,261 1055,292 1835,312 1687,323 864,325 1199,328 761,329 1520,341 600,344 174,345 1302.11,356.7 861,371 1366.11,384.7 560,386 1867,388 1364.11,426.7 1191,442 1362.11,460.7 1914.48,462.01 1766.8,470.59 915,514 1174,524 1224.11,524.7 1510,534 874,537 343,546 1624,549 1935,550 656,551 290,563 1334,574 815,585 1625,585 1963,596 1049.11,610.7 572,611 449,650 315,670 962,690 1001,691 482,700 1170.11,716.7 1274,723 1914.8,737.99 1429,758 1655,783 329,786 685,804 1459,807 404,829 917,837 906,859 1812,879
HPCOM: P2.18 R26.1 U1.3 | length 648.9
  Top Layer w6: U1.3 1444.86,316.14 1469.27,291.73 v1(1469.27,132) 1469.27,131.27 R26.1
  Bottom Layer w6: v1(1469.27,132) 1485,132 1512,105 1512,39 1534,17 1727,17 P2.18
HPCOMFB: C6.1 R26.2 U1.2 | length 257.5
  Top Layer w6: v1(1376.11,300.7) 1376.42,300.39 U1.2 1430.61,300.39 1449,282 R26.2
  Bottom Layer w16: v1(1376.11,300.7) 1393.3,300.7 1404,290 C6.1
HPL: R37.2 U1.1 | length 124.9
  Top Layer w6: U1.1 1401.93,212.07 1414,200 R37.2@1414,164.73
HPR: R34.2 U1.88 | length 95.3
  Top Layer w6: U1.88 1375.35,194.65 1380,190 R34.2
LCD_CLK: P1.30 U1.26 | length 600.3
  Top Layer w4: U1.26 1328.11,702.11 1336,710 1465,710 1520,655 1686.73,655 1704.72,637.01 P1.30
LCD_D3: P1.24 U1.7 | length 490.6
  Top Layer w4: U1.7 1558.13,379.13 1697.9,518.9 P1.24
LCD_D4: P1.25 U1.8 | length 492.3
  Top Layer w4: U1.8 1558.88,394.88 1702.58,538.58 P1.25
LCD_D5: P1.26 U1.9 | length 493.9
  Top Layer w4: U1.9 1559.63,410.63 1707.27,558.27 P1.26
LCD_D6: P1.27 U1.10 | length 495.5
  Top Layer w4: U1.10 1561.38,426.38 1712.95,577.95 P1.27
LCD_D7: P1.28 U1.11 | length 497.2
  Top Layer w4: U1.11 1563.13,442.13 1718.64,597.64 P1.28
LCD_D10: P1.15 U1.12 | length 480.9
  Top Layer w4: U1.12 v1(1457.04,457.87) ; v1(1794.27,341.73) P1.15
  Bottom Layer w4: v1(1457.04,457.87) 1573.18,341.73 v1(1794.27,341.73)
LCD_D11: P1.16 U1.13 | length 479.2
  Top Layer w4: U1.13 v1(1442.04,473.62) ; v1(1806.58,361.42) P1.16
  Bottom Layer w4: v1(1442.04,473.62) 1463.38,473.62 1575.58,361.42 v1(1806.58,361.42)
LCD_D12: P1.17 U1.14 | length 477.6
  Top Layer w4: U1.14 1402.23,489.07 v1(1424.04,489.07) ; v1(1793.9,381.1) P1.17
  Bottom Layer w4: v1(1424.04,489.07) 1468.93,489.07 1576.9,381.1 v1(1793.9,381.1)
LCD_D13: P1.18 U1.15 | length 478
  Top Layer w4: U1.15 v1@1440.09,505.12 ; v1(1806.79,400.79) P1.18
  Bottom Layer w4: v1(1438.04,505.07) 1472.93,505.07 1577.21,400.79 v1(1806.79,400.79)
LCD_D14: P1.19 U1.16 | length 474.3
  Top Layer w4: U1.16 v1(1422.83,520.87) ; v1(1793.47,420.47) P1.19
  Bottom Layer w4: v1(1422.83,520.87) 1480.13,520.87 1580.53,420.47 v1(1793.47,420.47)
LCD_D15: P1.20 U1.17 | length 472.7
  Top Layer w4: U1.17 v1(1437.39,536.61) ; v1(1806.16,440.16) P1.20
  Bottom Layer w4: v1(1437.39,536.61) 1484.39,536.61 1580.84,440.16 v1(1806.16,440.16)
LCD_D19: P1.8 U1.19 | length 680.6
  Top Layer w4: v1(1378.04,568.11) U1.19 ; v1(1727,273) 1796.06,203.94 P1.8
  MidLayer1 w4: v1(1378.04,568.11) 1515.89,568.11 1717,367 1717,283 v1(1727,273)
LCD_D20: P1.9 U1.21 | length 716.8
  Top Layer w4: v1(1361.3,599.61) U1.21 ; v1(1749.17,272.54) 1798.09,223.62 P1.9
  MidLayer1 w4: v1(1361.3,599.61) 1502.39,599.61 1727,375 1727,294.72 v1(1749.17,272.54)
LCD_D21: P1.10 U1.23 | length 731.3
  Top Layer w4: U1.23 v1(1375.35,687.7) ; v1(1763,287) 1806.69,243.31 P1.10
  MidLayer1 w4: v1(1375.35,687.7) 1434.3,687.7 1737,385 1737,313 v1(1763,287)
LCD_D22: P1.11 U1.24 | length 762.9
  Top Layer w4: U1.24 v1(1359.61,670.7) ; v1(1763,307) 1807.01,262.99 P1.11
  MidLayer1 w4: v1@1361.35,672.45 v1(1359.61,670.7) 1359.61,700.61 1367,708 1429,708 1748,389 1748,322 v1(1763,307)
LCD_D23: P1.12 U1.25 | length 771.5
  Top Layer w4: U1.25 1344.11,642.18 v1(1344.11,686.7) ; v1(1763,327) 1807.32,282.68 P1.12
  MidLayer1 w4: v1(1344.11,686.7) 1344.11,700.11 1361,717 1434,717 1763,388 v1(1763,327)
LCD_DE: P1.34 U1.27 | length 625.3
  Top Layer w4: U1.27 1312.36,697.68 1334.69,720 1471,720 1519,672 1767,672 1810.75,715.75 P1.34
LCD_HSYNC: P1.32 U1.28 | length 617.7
  Top Layer w4: U1.28 v1(1296.61,670.7) ; v1(1807,676) 1807.38,676.38 P1.32
  MidLayer1 w4: v1(1296.61,670.7) 1296.61,678.61 1347,729 1580.29,729 1593.29,716 1767,716 v1(1807,676)
LCD_VSYNC: P1.33 U1.29 | length 640.2
  Top Layer w4: U1.29 v1(1280.87,684.7) ; v1(1814.06,696.06) P1.33
  MidLayer1 w4: v1(1280.87,684.7) 1339.17,743 1585,743 1598,730 1780.12,730 v1(1814.06,696.06)
LEDA: P1.2 R23.2 U5.5 | length 448.5
  Top Layer w10: P1.2 1879.14,85.83 v1(1891.31,98)
  Bottom Layer w4: U5.5 1911,98
  Bottom Layer w7: 1921,98 1930.07,107.07 1930.07,168.07 1959,197 R23.2@1959,400
  Bottom Layer w8: v1(1891.31,98) 1911,98 1921,98
LEDK: P1.1 R4.2 U5.3 | length 248.6
  Top Layer w8: R4.2 1784.73,82.27 1800.86,66.14 P1.1 1916.54,66.14 v1(1948.4,98)
  Bottom Layer w8: v1(1948.4,98) U5.3
LINL: U1.86
LRADC: C49.2 P2.13 R29.1 U1.79 | length 238.3
  Top Layer w6: U1.79 1233.62,224.28 1226,216.65 1226,201 1210.27,185.27 R29.1 C49.2 1210.27,99.73 P2.13
MICIN: C46.2 U1.87 | length 102.1
  Top Layer w6: v1(1359.61,193.61) U1.87
  Bottom Layer w6: C46.2 1343.27,186.27 1350.61,193.61 v1(1359.61,193.61)
NetC42_1: C42.1 R25.1 U7.5 U7.6 | length 151.9
  Bottom Layer w6: R25.1 131.54,717.27 C42.1 171.63,750.73 203.16,719.21 U7.6 U7.5
NetC44_1: C44.1 P2.14 | length 101.1
  Top Layer w6: C44.1 1312,98 P2.14
NetC45_1: C45.1 P2.15 | length 157.2
  Top Layer w6: C45.1 1346,115 1373,88 1422,88 P2.15
NetC46_1: C46.1 M1.1 R27.2 | length 357.2
  Bottom Layer w4: C46.1 1421.73,213 1528,213 1569,254 1628.91,254 M1.1
  Bottom Layer w8: R27.2 C46.1
NetC47_1: C47.1 R46.2 U11.4 U11.5 | length 122
  Top Layer w15: C47.1 1598.68,152 1621.32,152 R46.2
  Bottom Layer w15: v1(1610,152) U11.5 U11.4
NetC54_1: C54.1 R34.1 R37.1 | length 35
  Top Layer w10: R34.1 R37.1
  other v1: 1402,131.27
NetC54_2: C54.2 U11.3 | length 164.2
  Bottom Layer w10: C54.2 1518.73,168.73 1539.4,189.4 U11.3
NetC56_2: C56.2 D1.K R23.1 | length 137.9
  Bottom Layer w16: R23.1 1900.47,383.05 D1.K 1936.53,284.84 C56.2
NetD1_A: D1.A L4.2 U5.1 | length 215.2
  Bottom Layer w24: U5.1 1873.6,165.32 1882.28,174 L4.2 1882.28,342.19 D1.A
NetD4_K: D4.K U6.7 | length 101.4
  Top Layer w6: U6.7 1579.61,750 v1(1655,750)
  Bottom Layer w16: v1(1655,750) D4.K
NetDS1_K: DS1.K R6.1 | length 59.4
  Top Layer w6: v1(79,470) DS1.K
  Bottom Layer w6: R6.1 55.27,470 v1(79,470)
NetL1_1: L1.1 U4.11 | length 47.9
  Top Layer w10: L1.1 U4.11@328,389.46
NetL2_1: L2.1 U4.20 | length 68.5
  Top Layer w12: U4.20 v1(420.04,492.96)
  Bottom Layer w20: L2.1 393.43,519.57 v1(420.04,492.96)
NetL3_1: L3.1 U4.6 | length 44.8
  Top Layer w10: U4.6 v1(299.96,497.96)
  Bottom Layer w26: L3.1 v1(299.96,497.96)
NetP1_35: P1.35 R31.2 | length 141
  Top Layer w6: P1.35 1878.43,735.43 1900,757 v1(1900,803)
  Bottom Layer w6: v1@1900.27,803.27 R31.2
NetP1_37: P1.37 U6.2 | length 138.3
  Top Layer w6: U6.2 1782.31,710.31 1809,737 1809,767 1816.8,774.8 P1.37
NetP1_38: P1.38 U6.3 | length 141.2
  Top Layer w6: U6.3 1780,730 1797,747 1797,782 1809.49,794.49 P1.38
NetP1_39: P1.39 U6.4 | length 141.8
  Top Layer w6: U6.4 1778.72,749.68 1785,755.97 1785,791.97 1807.2,814.17 P1.39
NetP1_40: P1.40 U6.5 | length 120.7
  Top Layer w6: U6.5 1805.2,833.86 P1.40
NetR8_2: R8.2 R9.1 U4.14 | length 98.9
  Top Layer w6: U4.14 375.75,365.25 v1(387,354)
  Bottom Layer w6: v1(387,354) R8.2 R9.1
NetR10_2: R10.2 R11.1 U4.3 | length 301.6
  Top Layer w4: v1(296,541) 296,529.32 314.23,511.08 314.23,494.35 322.58,486 355,486 360,491 U4.3
  Bottom Layer w5: R10.2 150.27,482.54 R11.1
  Bottom Layer w6: R11.1 183.73,523.73 201,541 v1(296,541)
NetR12_2: R12.2 R13.1 U4.2 | length 165.9
  Top Layer w6: R13.1 375.2,633.73 ; U4.2 375.2,510.58 375.2,633.73 ; R12.2 375.2,633.73
NetR25_2: R25.2 U7.9 | length 270.2
  Bottom Layer w6: R25.2 131,780 162,811 291,811 305.16,796.84 U7.9
NetR32_1: R32.1 R35.1 R36.2 U5.4 | length 967
  Bottom Layer w6: R35.1 R32.1 R36.2 1917.11,874.84 1952.16,874.84 1982.09,844.91 1982.09,92.32 U5.4
NetR38_1: R38.1 U8.24 | length 38.4
  Top Layer w4: U8.24 935.04,704.69 R38.1
NetR39_2: R39.2 R40.2 U7.21 | length 253.4
  Top Layer w4: v1(325,559) 325,657 365,697 R39.2 367.27,731 R40.2
  Bottom Layer w6: U7.21 325,591.1 v1(325,559)
NetR41_1: R41.1 U8.23 | length 38.1
  Top Layer w4: R41.1 915.35,704.09 U8.23
NetR42_2: R42.2 R43.2 U7.20 | length 203.9
  Top Layer w4: v1(344.53,569.53) 333,581.06 333,645 354,666 R42.2 R43.2
  Bottom Layer w4: v1(344.53,569.53) U7.20
OUT+: P2.17 U11.6 | length 69
  Bottom Layer w15: U11.6 1649.37,60.63 P2.17
OUT-: P2.16 U11.1 | length 69
  Bottom Layer w15: P2.16 1570.63,60.63 U11.1
PA0: P2.10 P4.1 U1.66 | length 1713.9
  Top Layer w6: P2.10 960,226.57 U1.66
  MidLayer1 w6: P2.10 997,87 1758,87 1945,274 1945,484 v1(1878.21,550.79)
  Bottom Layer w6: P4.1 v1(1878.21,550.79)
PA1: P2.9 R44.1 U1.65 | length 699.6
  Top Layer w6: P2.9 860,156.81 v1(884,180.81) 1003.59,300.39 U1.65
  Bottom Layer w6: R44.1 864.81,200 v1(884,180.81)
PA2: P2.8 R40.1 U1.64 | length 1340.8
  Top Layer w4: R40.1 474,684.73 474,295 v1(461,282)
  Top Layer w6: P2.8 760,88.36 v1(926,254.36) 987.79,316.14 U1.64
  MidLayer1 w4: v1(461,282) 466.44,276.56 903.8,276.56 v1(926,254.36)
PA3: P2.7 R42.1 U1.63 | length 1399.4
  Top Layer w4: R42.1 458,666 465,659 465,315 436,286 v1(436,270)
  Top Layer w6: P2.7 660,137 725.5,202.5 812.72,202.5 v1(860,249.78) 942.11,331.89 U1.63
  MidLayer1 w4: v1(436,270) 447,259 850.78,259 v1(860,249.78)
PE12: D4.A P4.4 R33.1 U1.37 | length 986.9
  Top Layer w4: U1.37 1154.88,676.88 1221,743 1484,743 1530,789 v1(1621,789)
  Bottom Layer w6: v1(1621,789) 1621.47,788.53 D4.A 1621.47,631.53 1643.16,609.84 P4.4 1892.16,609.84 1893,609 v1(1893,609.84)
RSTN: C20.1 P2.5 R3.1 R45.2 S2.1 U1.70 | length 1009.5
  Top Layer w6: P2.5 v1(460,135) 474.92,149.92 S2.1 ; v1(1057,168) 1091.89,202.89 U1.70
  MidLayer1 w6: P2.5 538,128 1017,128 v1(1057,168)
  Bottom Layer w6: v1(460,135) 493.73,135 R45.2
  Bottom Layer w14: C20.1 R3.1 v1(1057,168)
SDC0_CLK: J1.5 U1.56 | length 496.5
  Top Layer w6: J1.5 583.48,420.48 605.13,442.13 U1.56
SDC0_CMD: J1.3 R18.2 U1.55 | length 541.2
  Top Layer w6: J1.3 549.91,507.09 599.13,457.87 U1.55
  Bottom Layer w6: R18.2 v1@549.91,507.09
  other v1: 550,507
SDC0_D0: J1.7 R17.2 U1.57 | length 559
  Top Layer w6: J1.7 558.86,333.86 651.38,426.38 U1.57
  Bottom Layer w6: R17.2 v1@549.86,333.86
  other v1: 550,334
SDC0_D1: J1.8 R16.2 U1.58 | length 570.6
  Top Layer w6: J1.8 v1(550,290.56) 575.56,290.56 695.63,410.63 U1.58
  Bottom Layer w6: R16.2 v1(550,290.56)
SDC0_D2: J1.1 R20.2 U1.53 | length 563.8
  Top Layer w6: J1.1 550.3,593.7 654.63,489.37 U1.53
  Bottom Layer w6: R20.2 v1@549.7,593.7
  other v1: 550,594
SDC0_D3: J1.2 R19.2 U1.54 | length 556.2
  Top Layer w6: J1.2@527,550.4 v1(550,550.4) 626.78,473.62 U1.54
  Bottom Layer w6: R19.2 v1(550,550.4)
SPI0_CLK: U1.59 U3.6 | length 348.1
  Top Layer w6: v1(735,347) 782.88,394.88 v1(979.04,394.88) U1.59
  Bottom Layer w6: U3.6 v1(735,347)
SPI0_CS: R7.1 U1.60 U3.1 | length 586.7
  Top Layer w6: v1(951.79,379.13) U1.60
  Bottom Layer w6: U3.1 678.81,642 812,642 938,516 938,497.27 R7.1 957.27,450.27 951.79,444.79 v1(951.79,379.13)
SPI0_MISO: S1.1 U1.61 U3.2 | length 774.4
  Top Layer w6: S1.1 791.92,149.92 v1(932,290) ; v1(932,362) 976.97,362 978.04,363.07 ; 978.35,363.39 U1.61
  Bottom Layer w6: U3.2 685,576 705,556 770,556 932,394 v1(932,362) v1(932,290)
SPI0_MOSI: U1.62 U3.5 | length 279.4
  Top Layer w6: v1(785,347.64) 785.64,347 1017.43,347 U1.62
  Bottom Layer w6: U3.5 v1(785,347.64)
SVREF: C17.2 C24.1 R5.1 R14.2 U1.33 | length 165.7
  Top Layer w10: v1(1217.87,611.94) U1.33
  Bottom Layer w10: C17.2 R14.2 1211.73,605.8 v1(1217.87,611.94) 1230.06,611.94 1242.27,599.73 R5.1 C24.1
TV_IN0: R30.1 TP1.1 U1.78 | length 409.1
  Top Layer w8: v1@1217.87,231 U1.78
  Top Layer w15: v1(1488.27,196.27) 1496.54,188 TP1.1
  MidLayer1 w8: v1(1218,231) 1218,197 1246,169 1461,169 v1(1488.27,196.27)
  Bottom Layer w8: v1(1488.27,196.27) R30.1
TV_OUT: P2.12 R28.1 U1.72 | length 256.5
  Top Layer w6: v1(1112,222) 1123,222 ; U1.72 1123.39,221.61 1160,185 P2.12
  Bottom Layer w6: R28.1 v1(1112,222)
TV_VRN: C11.1 C13.2 U1.75 | length 94.4
  Top Layer w6: U1.75 1170.88,258.07 v1(1170.88,227.93)
  Bottom Layer w12: C13.2 1165,167.73 1165,222.05 v1(1170.88,227.93)
TV_VRP: C11.2 C12.2 U1.76 | length 96.2
  Top Layer w6: U1.76 1186.38,232.66 v1(1191.11,227.93)
  Bottom Layer w12: v1(1191.11,227.93) 1198,221.04 C12.2
U_N: J3.2 U7.4 | length 132.9
  Top Layer w4: v1(170,691) 225.51,691 J3.2@230.09,695.58
  Bottom Layer w4: v1(170,691) 181.16,679.84 U7.4
U_P: J3.3 U7.3 | length 130.4
  Top Layer w4: v1(170,665) 225.1,665 J3.3@230.09,669.99
  Bottom Layer w4: v1(170,665) 187,665 191.84,660.16 U7.3
USB_DM: J2.2 U1.68 | length 901.7
  Top Layer w4: J2.2 v1(244.76,260.24) ; v1(1060.39,223.39) U1.68
  MidLayer1 w4: v1(244.76,260.24) 281.61,223.39 v1(1060.39,223.39)
USB_DP: J2.3 U1.69 | length 926.3
  Top Layer w4: J2.3 v1(245.65,234.65) ; v1(1076.14,210) U1.69
  MidLayer1 w4: v1(245.65,234.65) 259.04,234.65 278.29,215.39 1048.59,215.39 1054.59,209.39 1075.54,209.39 v1(1076.14,210)
VCC3V3: C14.2 C16.2 C18.2 C28.1 C29.2 C36.2 C37.2 C38.2 C39.2 C41.1 C51.2 C52.1 C59.1 C60.2 DS1.A J1.4 L1.2 P1.4 P1.31 P2.6 P4.2 R3.2 R7.2 R8.1 R15.1 R16.1 R17.1 R18.1 R19.1 R20.1 R21.2 R22.2 R31.1 R33.2 R36.1 R41.2 U1.4 U1.5 U1.20 U1.50 U1.67 U2.3 U3.3 U3.7 U3.8 U6.1 U9.3 U10.3 | length 2930.7
  Top Layer w4: P1.31 v1(1922.69,656.69)
  Top Layer w6: v1(79,430) DS1.A
  Top Layer w8: v1(991.11,536.61) U1.50 ; U1.4 1422.36,331.89 v1(1430.47,340) 1422.83,347.64 U1.5 ; v1(1670,691) 1670.37,690.63 U6.1
  Top Layer w10: v1(911,612) R41.2
  Top Layer w14: U1.20 v1(1468,583.86)
  Top Layer w16: v1(976,186) 1002.27,212.27 1002.27,231.27 1029.07,258.07 U1.67@1044.46,258.07 ; v1(1724.27,144.27) C60.2 1793.73,144.27 1812.8,125.2 P1.4
  Top Layer w20: v1(280.57,288.43) L1.2
  Bottom Layer w4: v1(1933.73,803.27) R31.1 R36.1
  Bottom Layer w6: C51.2 1666.27,588.96 1685.02,570.2 1714.44,570.2 1714.71,570.47 P4.2
  Bottom Layer w8: R3.2 994,168 v1(976,186) 992,202 C39.2 ; U2.3@1299.11,406.7 1366.11,339.7 ; R22.2 R21.2 1653.27,687.54 1656.73,691 v1(1670,691) ; P4.2 1896.47,570.47 1922.69,596.69 v1(1922.69,656.69)
  Bottom Layer w10: R16.1 R17.1 C41.1 R18.1 R19.1 R20.1 ; 483.45,463.78 v1(530.51,463.78) ; U3.3 v1(757.81,598.19) ; 1098.53,401.34 1130.27,369.6 R15.1
  Bottom Layer w14: C37.2@1450.41,583.86 v1(1468,583.86) 1484.59,583.86 C36.2 ; C14.2 C16.2
  Bottom Layer w16: C18.2 626,246 635,255 U3.8 U3.7 ; U10.3 U9.3 ; v1(991.11,536.61) 991.11,464.13 v1(1053.9,401.34) 1098.53,401.34 1169.19,472 1274,472 1299.11,446.89 U2.3 U2.3@1299.11,406.7 ; 1366.11,339.7 C16.2@1453.57,339.7
  Bottom Layer w20: v1(280.57,288.43) 287.42,295.27 C28.1 C29.2 368.73,295.27 v1(387,277)
  other v1: 661,301.81 640,860.26
VCC_CORE: C1.2 C2.2 C3.2 C10.2 C32.1 C33.2 L2.2 R12.1 R24.2 U1.22 U1.35 U1.71 | length 1827.9
  Top Layer w7: v1(1186.38,614.7) U1.35
  Top Layer w10: R12.1 C32.1
  Top Layer w12: U1.22 1402.11,615.54 v1(1402.11,634.7)
  Top Layer w16: C32.1@428,599 v1(447,580)
  Top Layer w20: C32.1@428,599 C32.1
  MidLayer1 w10: v1(1107.64,283) 1107.64,535.96 v1(1186.38,614.7) 1219.08,582 1288,582 1340.7,634.7 v1(1402.11,634.7)
  MidLayer1 w20: v1(447,580) 501,634 v1(549,634) 1167.08,634 v1(1186.38,614.7)
  Bottom Layer w10: v1(549,634) 598,683 R24.2 ; C3.2 1144,614.7 ; C1.2 1144,614.7 ; v1(1186.38,614.7) 1144,614.7
  Bottom Layer w16: C10.2 1093.73,296.91 v1(1107.64,283) ; v1(1402.11,634.7) 1418.41,651 C2.2
  Bottom Layer w20: L2.2@447,539.43 v1(447,580) C33.2
VCC_DRAM: C15.2 C19.2 C21.2 C24.2 C30.1 C31.2 L3.2 R5.2 R10.1 U1.30 U1.31 U1.32 U1.34 U1.36 | length 1665.8
  Top Layer w7: U1.36 v1(1170.63,663.22) ; U1.34 1202.13,659.72 v1(1218.11,675.7) ; U1.32 1233.62,672.96 1236.36,675.7 ; U1.31 v1(1249.37,675.7)
  Top Layer w12: U1.31 U1.30 1265.12,621.69 v1(1275.11,611.7)
  Top Layer w16: v1(1218.11,675.7) 1236.36,675.7 v1(1249.37,675.7)
  MidLayer1 w10: v1(206,407) 242,407 498.22,663.22 v1(1170.63,663.22)
  Bottom Layer w6: R10.1 183.73,429.27 v1(206,407)
  Bottom Layer w12: C24.2 R5.2 1274.89,587.84 1274.89,611.7 v1(1275.11,611.7) 1302.3,611.7 1309,605 C21.2
  Bottom Layer w14: v1(1170.63,663.22) 1196.38,688.97 C15.2 ; C19.2 1249.11,675.96 v1(1249.37,675.7)
  Bottom Layer w20: v1(206,407) C30.1 C31.2 218.43,451.84 L3.2
VCC_TV: C34.2 C35.2 R15.2 U1.73 | length 120.5
  Top Layer w6: U1.73 v1(1139.13,287)
  Bottom Layer w16: v1@1139.4,286.73 C34.2 ; R15.2@1164,319.73 C34.2 ; C35.2 C34.2
VCCIN: C23.1 C25.1 C26.1 C27.1 C43.2 C55.2 J2.1 J3.1 L4.1 P2.1 R46.1 U4.7 U4.8 U4.9 U4.10 U4.16 U4.18 U4.19 U5.6 U7.7 U7.8 | length 3728.9
  Top Layer w7: 265.79,450 U4.8 ; 266.04,465.75 U4.7 ; 266.29,418.5 U4.10 ; 266.54,434.25 U4.9
  Top Layer w10: v1(420.04,405.04) U4.16 ; U4.18 449,450 451,452 v1(451,458) 451,463 448.25,465.75 U4.19
  Top Layer w16: 265.79,316.87 265.79,450 v1(265.79,774.79) ; v1(1485,103) 1655,103 1666.1,114.1 R46.1 1666.1,226.1 v1(1688.73,248.73)
  Top Layer w20: v1(164.17,285.83) J2.1 234.75,285.83 265.79,316.87 ; J3.1 265.79,716.53
  Top Layer w25: P2.1 44,66 44,309 64,329 143,329 164.17,307.83 v1(164.17,285.83)
  MidLayer1 w20: v1(266,380) 344,380 422,458 v1(451,458)
  Bottom Layer w16: v1(265.79,774.79) C43.2 ; v1(265.79,774.79) U7.7 U7.8 ; L4.1 1791.72,140.51 U5.6
  Bottom Layer w20: v1(164.17,285.83) 164.17,246.83 308,103 v1(1485,103) ; v1(420.04,405.04) 420.04,464.69 C25.1 444,465 v1(451,458) ; v1(1688.73,248.73) 1689,249 L4.1
VRA1: C4.1 U1.81 | length 72.9
  Top Layer w6: v1(1265.12,212.71) U1.81
  Bottom Layer w10: C4.1 v1@1265.27,212.56
VRA2: C5.2 C7.2 R1.2 U1.83 | length 121.8
  Top Layer w6: U1.83 v1(1296.61,287.7)
  Bottom Layer w12: v1(1296.61,287.7) 1304.11,280.2 1304.11,267.43 1308.81,262.73 C7.2 R1.2
XI: C9.1 U1.51 X1.3 | length 172.2
  Top Layer w6: U1.51 1041.28,520.87 1060,539.59 v1(1060,540)
  Bottom Layer w6: v1(1060,540) 1100,540 1107,547 X1.3 1107,601 1101.73,606.27 C9.1
XO: C8.2 U1.52 X1.1 | length 86.9
  Top Layer w6: U1.52 v1(1046.11,505.12)
  Bottom Layer w6: C8.2 1022,515.12 1032,505.12 v1(1046.11,505.12) X1.1@1066.53,505.12
pads on no net: J2.4 J3.4 U1.77 U7.1 U7.10 U7.11 U7.12 U7.13 U7.14 U7.15 U7.16 U7.17 U7.18 U7.19 U7.22 U7.23 U7.24 U8.1

## Polygon pours and split planes (outlines as drawn)
VCC3V3 on MidLayer1 "MidLayer1-No Net" (solid, remove dead copper, pour order 0): 1.41,900.04 2001.41,900.04 2001.41,0.04 1.41,0.04
GND on Top Layer "MidLayer1-No Net" (solid, remove dead copper, pour order 2): -2.75,899.22 1997.25,899.22 1997.25,-0.78 -2.75,-0.78
GND on Bottom Layer "MidLayer1-No Net" (solid, remove dead copper, pour order 4): -0.55,899.62 1999.45,899.62 1999.45,-0.38 -0.55,-0.38
GND on GND (split plane): 1979.9,20.1 20.1,20.1 20.1,47.68 33.9,61.47 36.39,64.52 38.25,67.99 39.4,71.76 39.78,75.68 39.78,825.31 39.4,829.24 38.25,833.01 36.39,836.48 33.9,839.53 20.1,853.32 20.1,879.9 1979.9,879.9

## Keep-outs
Keep-Out Layer:
  the board outline again, w5

## Silkscreen, mask and mechanical layers (free items; w line width, h text height)
Top Overlay:
  circle w10: c1833,62 r7.07
  text "PE1" at 96.69,897.45 h40 r270
  text "PE0" at 6.11,895.96 h35 r270
  text "PE10" at 1598.39,891.92 h40 r270
  text "PE11" at 1697.97,889.47 h40 r270
  text "PE4" at 997,882 h40 r270
  text "PE5" at 1098.25,882.09 h40 r270
  text "PE6" at 1198.28,882 h40 r270
  text "PE7" at 1297.86,882 h40 r270
  text "PE8" at 1398.33,882.02 h40 r270
  text "PE9" at 1498.36,882.02 h40 r270
  text "PE2" at 196.72,880.87 h40 r270
  text "PE3" at 297.19,881 h40 r270
  text "TTL" at 249,712 h60 r270
  text "TINY200 r3" at 1021,700 h80
  text "DVP" at 724,677 h60
  text "PWR" at 133,439 h40
  text "SDIO" at 710,430.31 h60
  text "widora.io" at 1510.63,392.63 h60
  text "20200510" at 1548,352 h40
  text "OTG" at 249,280 h60 r270
  text "RST" at 341,216 h60
  text "AG" at 1430,213 h40
  text "TVI" at 1428,179 h40
  text "BOOT" at 780,130 h60
  text "COM" at 1700,90.06 h40 r270
  text "GND" at 300.39,88.43 h40 r270
  text "AGD" at 1000.19,88.41 h40 r270
  text "ADC" at 1200.14,87.65 h40 r270
  text "TVO" at 1100.17,86.13 h40 r270
  text "OUT" at 1499.61,86.63 h40 r270
  text "RST" at 400.36,84.58 h40 r270
  text "OUT" at 1599.58,83.3 h40 r270
  text "PA3" at 600.31,82.19 h40 r270
  text "PA2" at 699.83,82.06 h40 r270
  text "PA0" at 900.22,82.16 h40 r270
  text "3V3" at 500.33,80.84 h40 r270
  text "PA1" at 799.81,79.71 h40 r270
  text "INR" at 1299.67,79.45 h40 r270
  text "INL" at 1399.64,76.12 h40 r270
  text "SCL" at 100,73 h40 r270
  text "SDA" at 199.97,73.26 h40 r270
  text "VIN" at 6,60 h35 r270
Bottom Overlay:
  lines w1: 22.76,263.25 23.76,263.25
  lines w4: 1813,23 1813,160
  text "PE0" at 6,842 h35 r270
  text "PE1" at 96.69,840.52 h40 r270
  text "PE2" at 196.72,818.13 h40 r270
  text "PE3" at 297.19,818 h40 r270
  text "PE4" at 998,818.06 h40 r270
  text "PE5" at 1094.25,817.91 h40 r270
  text "PE6" at 1197.28,818 h40 r270
  text "PE7" at 1296.86,818 h40 r270
  text "PE8" at 1397.33,817.98 h40 r270
  text "PE9" at 1497.36,817.98 h40 r270
  text "PE11" at 1696.97,810.53 h40 r270
  text "PE10" at 1597.39,808.08 h40 r270
  text "CS" at 623,642 h40 r270
  text "MI" at 672,642 h40 r270
  text "GND" at 772,632 h40 r270
  text "MO" at 773,213 h40 r270
  text "CLK" at 723,199 h40 r270
  text "INL" at 1399.64,28.87 h40 r270
  text "PA1" at 799.81,25.29 h40 r270
  text "INR" at 1299.67,25.55 h40 r270
  text "3V3" at 500.33,24.16 h40 r270
  text "PA3" at 600.31,22.81 h40 r270
  text "PA2" at 699.83,22.94 h40 r270
  text "PA0" at 900.22,22.84 h40 r270
  text "RST" at 400.36,20.42 h40 r270
  text "TVO" at 1100.17,18.87 h40 r270
  text "OUT" at 1499.61,17.9 h40 r270
  text "OUT" at 1599.58,17.9 h40 r270
  text "ADC" at 1200.14,17.35 h40 r270
  text "GND" at 300.39,16.57 h40 r270
  text "AGD" at 1000.19,16.59 h40 r270
  text "COM" at 1700,14.94 h40 r270
  text "VIN" at 6,8 h35 r270
  text "SCL" at 100,7.97 h40 r270
  text "SDA" at 200,4 h40 r270